# Altium PCB IO_Combo_V1_2PCB.PcbDoc (part 2 of 3)
Units mil, origin at the board's own origin, x right, y up, seen from the top; angles counter-clockwise.
Board outline 5600 x 4000 mil, 4 copper layers (Top Layer, Plane_Gnd, Plane_Power, Bottom Layer), stack 23.756 mil thick; 126 components, 208 nets, 710 pads, 196 vias.
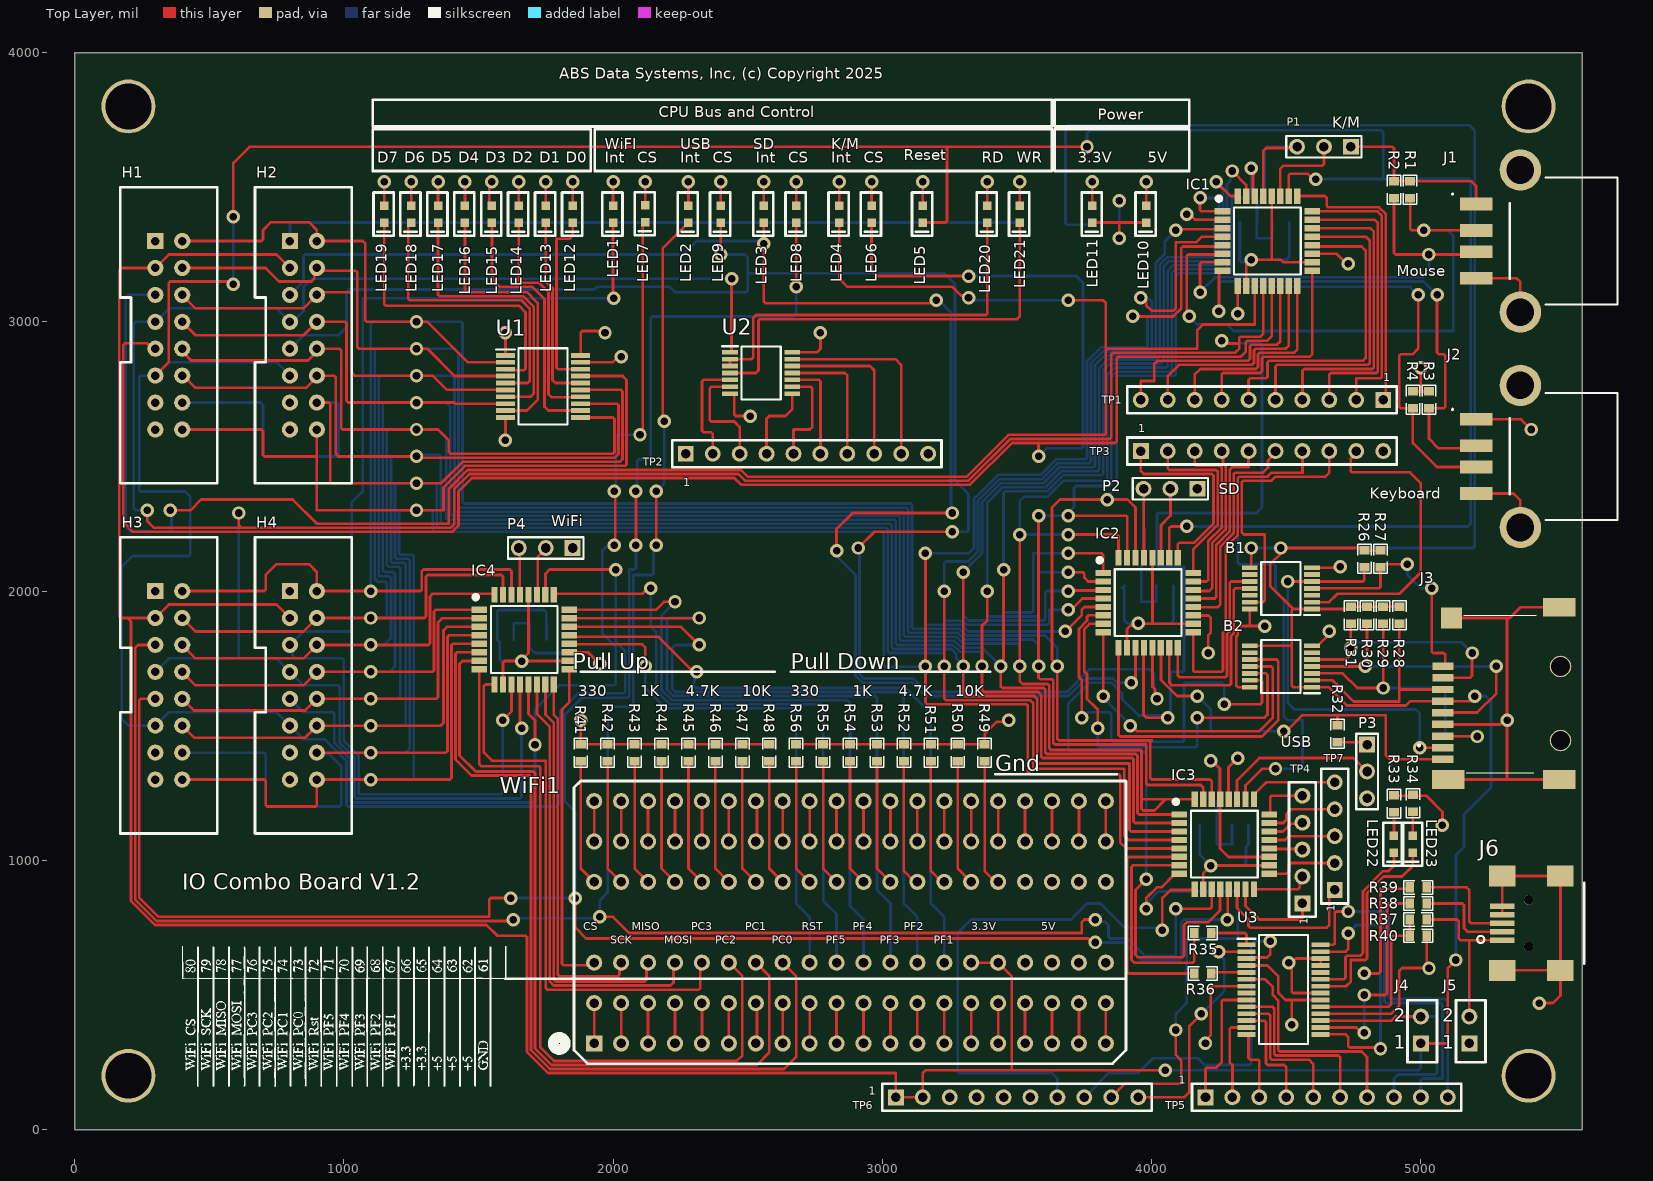
[diagram p0: Top Layer view]

## Via types
v1: diameter 50, hole 28, Top Layer to Bottom Layer, 196 vias

## Nets (pads, with @x,y where several pads share a name; then routed paths per layer and width w, separated by ;. In a path a pad name is that pad's centre, name@x,y a point inside that pad or via, vN(x,y) a via of type N, cw(c..) or ccw(c..) an arc to the next point about the centre after c; other vN are vias at no path point) (continued)
CPU_Reset: (continued)
  Bottom Layer w10: v1(590,3140) v1(590,3390) ; H2.11@800,2800 750,2850 350,2850 H1.11@300,2800 245.86,2800 240,2794.14 240,2375.86 245.86,2370 410,2370 430,2350 430,2135.86 424.14,2130 215.86,2130 175,2089.14 175,1525 200,1500 H3.11@300,1500 350,1550 750,1550 H4.11@800,1500 850,1450 928.79,1450 1010,1368.79 1010,1205.86 1015.86,1200 1790,1200 1805,1215 1805,1555 1870,1620 2039.14,1620 2045,1625.86 2045,1777.93 2010,1812.93 v1(2010,2080) ; v1(3760,3650) 3760,3700 3770.86,3710.86 4854.14,3710.86 4860,3705 4860,3530 ; v1(4130,2240) 4314.14,2240 ; v1(4460,1340) 4550,1340 4560,1350 4560,1520 4505.86,1520 4490.86,1535 4490.86,1969.14 4460,2000 4460,2094.14 4454.14,2100 4325.86,2100 4320,2105.86 4320,2234.14 4314.14,2240 ; v1(4610,3530) 4860,3530 ; 4314.14,2240 5175,2240 5185,2250 5185,3524.14 5179.14,3530 4860,3530
CPU_RnW: H1.7 H2.7 H3.7 H4.7 IC1.12 IC2.12 IC3.12 IC4.12 U2.1 | length 15927.9
  Top Layer w10: v1(270,2300) 270,2260 295,2235 620,2235 ; v1(610,2290) 610,2245 620,2235 ; IC4.12@1654.25,1653.15 1654.25,1495.75 v1(1660,1490) ; U2.1@2434.33,2886.77 2436.14,2886.77 2440,2890.63 v1(2440,3160) ; IC2.12@3970,1790 3970,1540 3980,1530 v1(4060,1530) ; v1(3980,930) 3940,890 3940,650 3950,640 4114.14,640 4120,645.86 4120,760 4130,770 4210,770 4254.25,814.25 IC3.12@4254.25,893.15 ; v1@4260,2920 4260.61,2919.39 4325,2919.39 ; IC1.12@4414.25,3133.15 4414.25,2954.25 4405,2945 4330.86,2945 4325,2939.14 4325,2919.39 ; 620,2235 1396.21,2235 1410.61,2249.39 1410.61,2369.39 1410,2370 1410,2378.79 1466.21,2435 2465,2435 2490,2410 3320,2410 3475,2565 3844.14,2565 3850,2570.86 3850,2879.14 3855.86,2885 4310.36,2885 4325,2899.64 4325,2919.39
  Bottom Layer w10: v1(270,2300) 225.86,2300 220,2305.86 220,2994.14 225.86,3000 H1.7@300,3000 350,3050 750,3050 H2.7@800,3000 810,3000 850,3040 850,3128.79 881.21,3160 v1(2440,3160) ; H3.7@300,1700 350,1750 610,1750 ; v1(610,2290) 610,1750 ; 1656.72,1456.72 1656.72,1486.72 v1(1660,1490) 1660,1235.86 1654.14,1230 1045.86,1230 1040,1235.86 1040,1381.21 985,1436.21 985,1644.14 979.14,1650 850,1650 H4.7@800,1700 750,1750 610,1750 ; v1(3980,930) 3980,1395 3970,1405 3695.86,1405 3690,1410.86 3690,1580 3770,1660 3850,1660 3890,1620 3890,1600 3952.35,1537.65 4052.35,1537.65 v1(4060,1530) 4067.65,1537.65 4067.65,1553.51 4070,1555.86 4070,1694.14 4075.86,1700 4114.14,1700 4120,1705.86 4120,2090 4025.86,2090 4020,2095.86 4020,2284.14 4025.86,2290 4390,2290 4410,2310 4410,2914.14 4404.14,2920 v1@4260,2920
  other v1: 4260,2930
CPU_RnW_Inverted: LED20.1 U2.2 U2.3 | length 1475.4
  Top Layer w10: U2.3@2434.33,2835.59 U2.2@2434.33,2861.18 2514.14,2861.18 2520,2867.04 2520,3014.14 2530.86,3025 3384.14,3025 3390,3030.86 LED20.1@3390,3368.5